# Altium PCB SwarmBots.PcbDoc
Units mm, origin at the board's own origin, x right, y up, seen from the top; angles counter-clockwise.
Board outline 23.94 x 24 mm, 4 copper layers (Component Side, Ground Plane, Power Plane, Solder Side), stack 1.1 mm thick; 73 components, 63 nets, 296 pads, 72 vias.
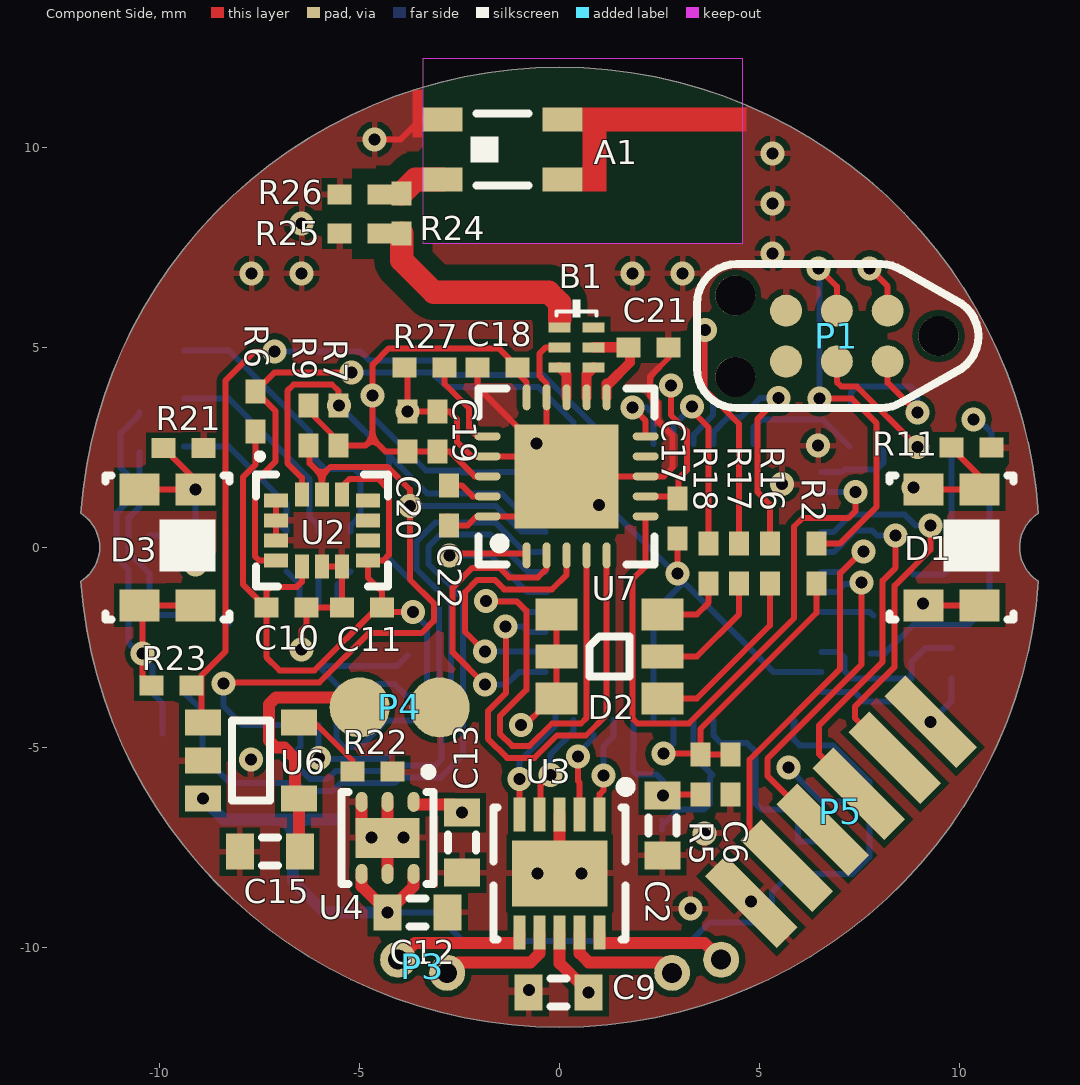
[diagram p0: Component Side view]
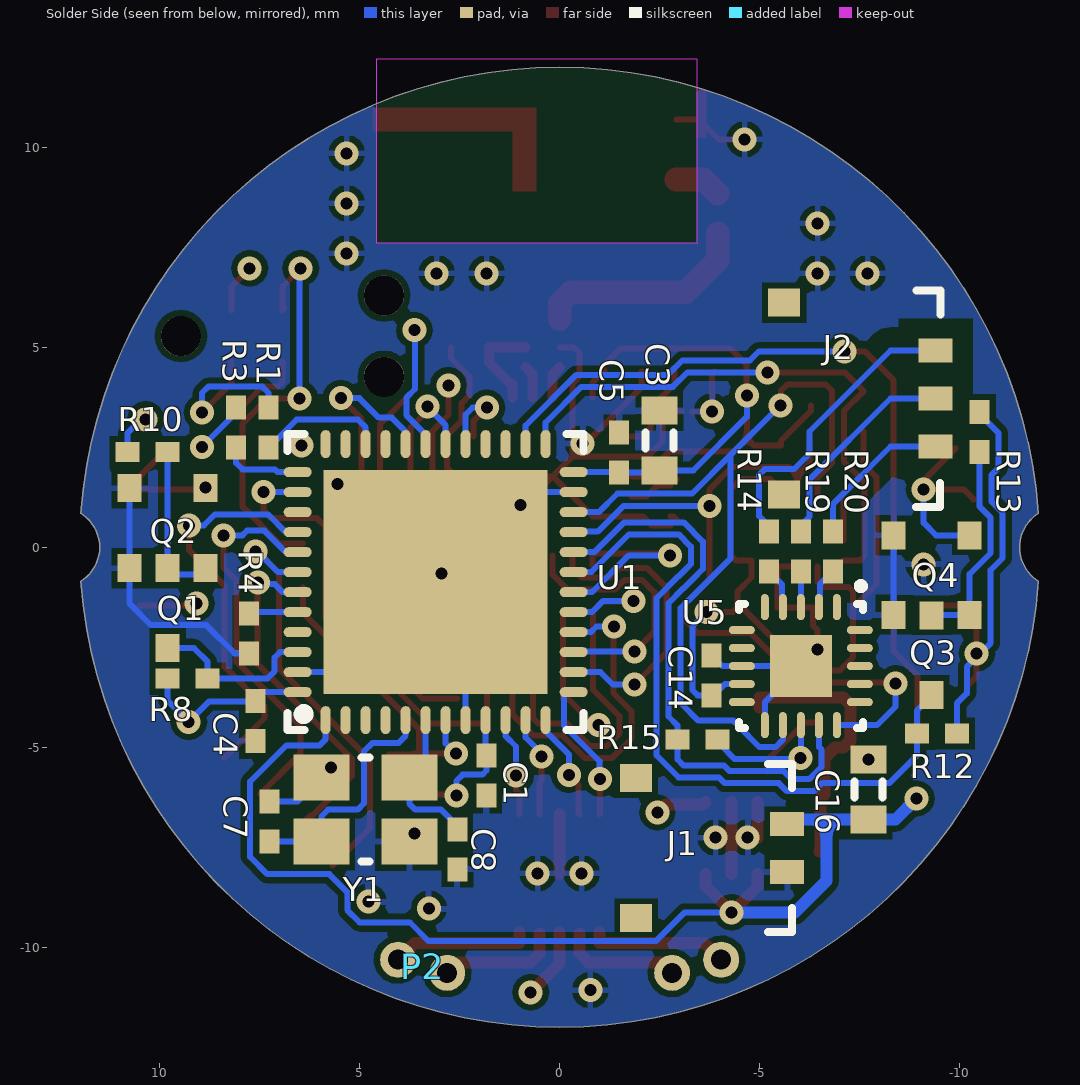
[diagram p1: Solder Side view, seen from below]
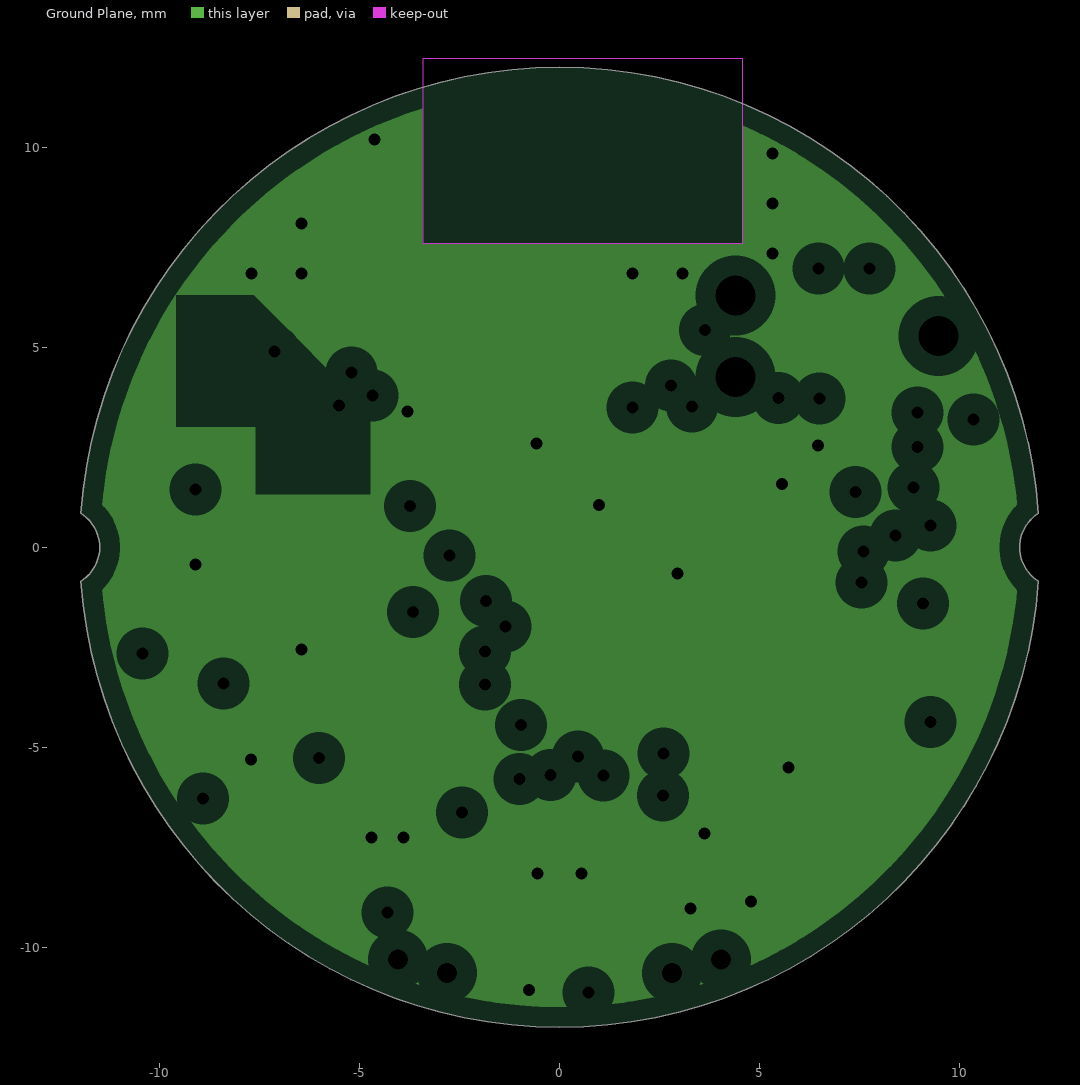
[diagram p2: Ground Plane, clearances drawn from the general rule]
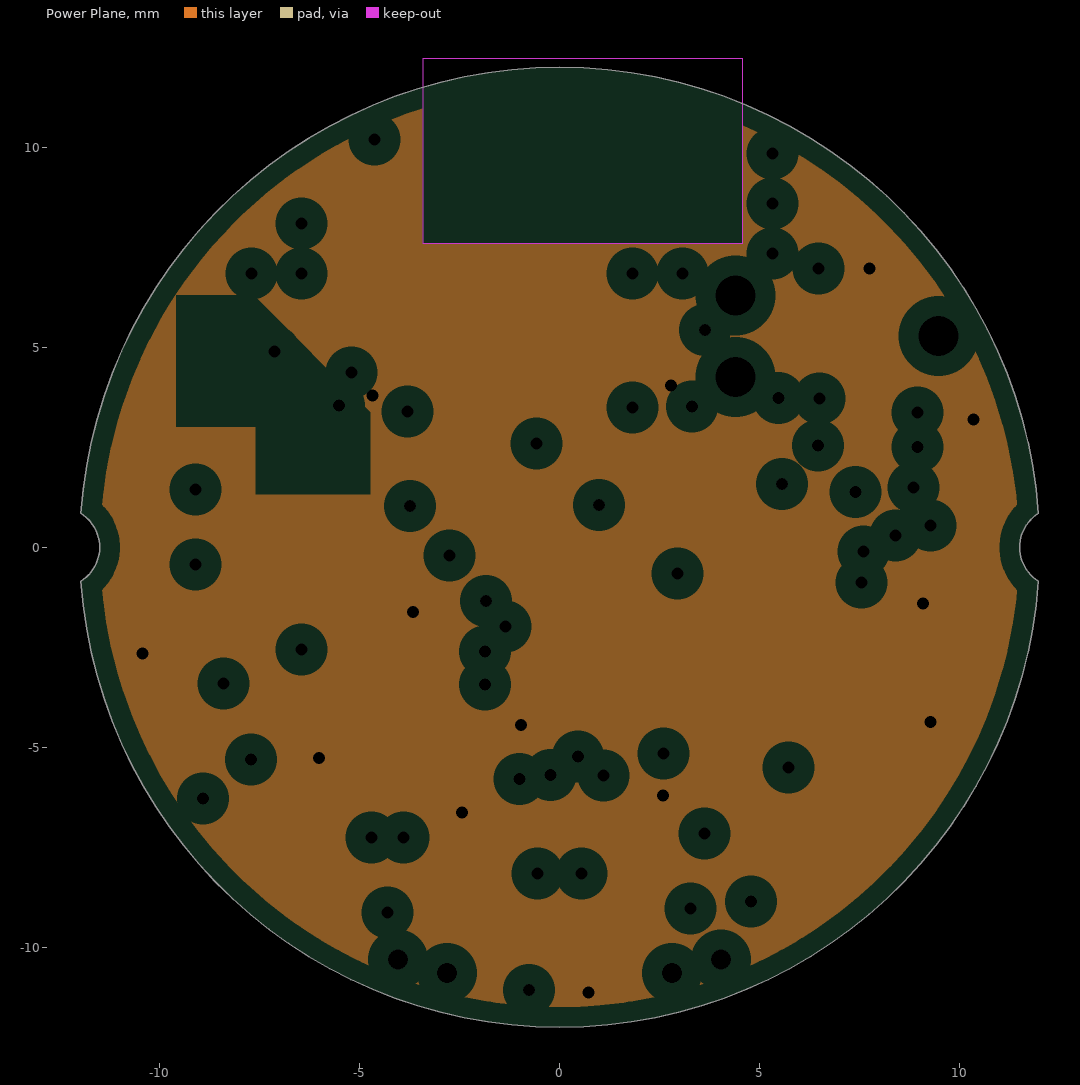
[diagram p3: Power Plane, clearances drawn from the general rule]

## Layer stack, top to bottom
Component Side: signal copper 0.035
Dielectric 1: prepreg 0.3, FR-4, Dk 4.2
Ground Plane: plane copper 0.035, net GND
Dielectric 3: prepreg 0.36, FR-4, Dk 4.2
Power Plane: plane copper 0.035, net +3.3V
Dielectric 4: prepreg 0.3, FR-4, Dk 4.2
Solder Side: signal copper 0.035

## Board outline
-11.97,-0.848 ccw(c0,0) 11.97,-0.848 cw(c12.5,0) 11.97,0.848 ccw(c0,0) -11.97,0.848 cw(c-12.5,0)

## Design rules (kind name [scope] priority, off if disabled: settings)
Clearance Clearance_Antenna [InNet('NetA1_1') Or InNet('NetB1_1') vs isRegion] p1: gap=0.4
Clearance Clearance_Electrodes [InNetClass('Electrodes') vs IsRegion] p2: gap=0.5
Clearance [All] p3: gap=0.15
ComponentClearance [All] p1: gap=0.15 collisioncheckmode=3 verticalgap=0.254 showdistances=FALSE
DiffPairsRouting [All] p1: maxlimit=10 minlimit=0.125 mostfreqgap=0.15 toplayer_minwidth=0.381 toplayer_maxwidth=0.381 toplayer_prefwidth=0.381 bottomlayer_minwidth=0.381 bottomlayer_maxwidth=0.381 bottomlayer_prefwidth=0.381 maxuncoupledlength=12.7
FabricationTestPointUsage FabricationTestPointUsage_1 [All] p1: valid=0 allowmultiple=FALSE
FabricationTestpoint FabricationTestpoint_1 [All] p1: side=3 testpointundercomponent=TRUE minsize=1.016 maxsize=2.54 preferedsize=1.524 minholesize=0 maxholesize=1.016 preferedholesize=0.813 testpointgrid=0.025 allowsidetop=TRUE allowsidebottom=TRUE usegrid=TRUE gridtolerance=0
HoleSize [All] p1: absolutevalues=TRUE maxlimit=6 minlimit=0.2 maxpercent=80.000 minpercent=20.000
HoleSize FabricationTestpoint [All] p2 off: absolutevalues=TRUE maxlimit=2.54 minlimit=0.025 maxpercent=80.000 minpercent=20.000
HoleSize FabricationTestPointUsage [All] p3 off: absolutevalues=TRUE maxlimit=2.54 minlimit=0.025 maxpercent=80.000 minpercent=20.000
MinimumSolderMaskSliver [All] p1: minsoldermaskwidth=0.01
PlaneClearance [All] p1: clearance=0.5
PlaneConnect [All] p1: planeconnectstyle=Relief reliefexpansion=0.4 reliefentries=4 reliefconductorwidth=0.15 reliefairgap=0.15
PolygonConnect [All] p1: connectstyle=Relief reliefconductorwidth=0.15 reliefentries=4 polygonreliefangle="90 Angle" airgapwidth=0.15
RoutingCorners [All] p1: cornerstyle=45-Degree minsetback=1.25 maxsetback=1.25
RoutingVias [All] p1: holewidth=0.3 width=0.6 viastyle="Through Hole" minholewidth=0.3 minwidth=0.6 maxholewidth=0.3 maxwidth=0.6
SilkToBoardRegionClearance [All] p1 off:
SilkToSilkClearance [All] p1: silktosilkclearance=0.1
SilkToSolderMaskClearance [IsPad] p1: minsilkscreentomaskgap=0.1 clearancetoexposedcopper=TRUE
SolderMaskExpansion [All] p1: expansion=0.075
UnpouredPolygon [All] p1: allowunpoured=FALSE
Width [All] p1: maxlimit=1 minlimit=0.15 preferedwidth=0.2 minimp=50.000000 maximp=50.000000 favimp=50.000000
17 further rules are at their usual default settings.

## Classes and differential pairs
component class SBMicrocontroller: C1 C2 C3 C4 C5 C6 C7 C8 P1 R1 R2 R3 R4 R5 U1 Y1
component class SBPeripherals: C9 C10 C11 C12 C13 C14 C15 C16 D1 D2 D3 J1 J2 P2 P3 P4 P5 Q1 Q2 Q3 Q4 R6 R7 R8 R9 R10 R11 R12 R13 R14 R15 R16 R17 R18 R19 R20 R21 R22 R23 U2 U3 U4 U5 U6
component class SBRadio: A1 B1 C17 C18 C19 C20 C21 C22 J3 R24 R25 R26 R27 U7
net class Electrodes: NetJ2_1 NetJ2_2 NetJ2_3 NetR14_1 NetR19_1 NetR20_1 NetU5_16
net class MOTOR_CONTROL[1..4]: MOTOR_CONTROL1 MOTOR_CONTROL2 MOTOR_CONTROL3 MOTOR_CONTROL4
net class RGBLED[1..3]: RGBLED1 RGBLED2 RGBLED3

## Components (designator, comment, footprint, x,y, rotation, side; value= is the part's Value field where it differs from the comment)
A1 "2450AT18D0100" 2450AT18D0100 -1.425,9.95 r0 top
B1 "2450BM14A0002T" 2450BM14A0002 0.425,5 r90 top
C1 "10nF" 0402 1.83,-5.71 r90 bottom
C2 "1uF" 0603 2.57,-6.95 r90 top
C3 "4.7uF" 0603 -2.49,2.67 r270 bottom
C4 "100nF" 0402 7.61,-4.34 r90 bottom
C5 "100nF" 0402 -1.485,2.375 r270 bottom
C6 "100nF" 0402 4.27,-5.68 r90 top
C7 "22pF" 0402 7.25,-6.86 r270 bottom
C8 "22pF" 0402 2.56,-7.55 r90 bottom
C9 "10uF" 0603 -0.025,-11.125 r0 top
C10 "100nF" 0402 -6.835,-1.51 r180 top
C11 "100nF" 0402 -4.94,-1.51 r0 top
C12 "1uF" 0603 -3.55,-9.125 r180 top
C13 "1uF" 0603 -2.44,-7.38 r90 top
C14 "100nF" 0402 -3.8,-3.2 r270 bottom
C15 "4.7uF" 0603 -7.245,-7.61 r0 top
C16 "4.7uF" 0603 -7.72,-6.05 r270 bottom
C17 "100nF" 0402 2.95,0.72 r90 top
C18 "100nF" 0402 -1.55,4.5 r0 top
C19 "10nF" 0402 -3.06,2.9 r270 top
C20 "1nF" 0402 -3.81,2.9 r270 top
C21 "2.2nF" 0402 2.22,5 r180 top
C22 "33nF" 0402 -2.77,1.05 r90 top
D1 "PD15-22C/TR8" PD15-22C/TR8 9.8,0 r270 top
D2 "SMLVN6RGB1W1" "3.5X2.8 MM 6-SMD" 1.24,-2.73 r0 top
D3 "PD15-22C/TR8" PD15-22C/TR8 -9.8,0 r270 top
J1 "78171-0002" 78171-0002 -3.8,-7.52 r270 bottom
J2 "78171-0003" 78171-0003 -7.51,3.72 r270 bottom
P1 "TC2030-IDC-NL" TC2030-IDC-NL 6.93,5.28 r180 top
P2 "HEADER 2X1 0.05\" UNPOLARIZED" "HEADER 2X1 0.05\" - UNPOLARIZED" 3.425,-10.475 r15 bottom
P3 "HEADER 2X1 0.05\" UNPOLARIZED" "HEADER 2X1 0.05\" - UNPOLARIZED" -3.425,-10.475 r165 top
P4 "CHARGING PAD" "CHARGING PAD" -4,-4 r0 top
P5 "EXTENSION_PORT" EXTENSION_PORT 9.275,-4.365 r225 top
Q1 "MMBT3904L" SOT23_L 9.8,-1.52 r270 bottom
Q2 "MMBT3904L" SOT23_L 9.8,0.48 r270 bottom
Q3 "MMBT3904L" SOT23_L -9.3,-2.69 r270 bottom
Q4 "MMBT3904L" SOT23_L -9.3,-0.7 r270 bottom
R1 "22R" 0402 7.28,2.99 r90 bottom
R2 "22R" 0402 6.42,-0.41 r90 top
R3 "22R" 0402 8.09,2.99 r90 bottom
R4 "100K" 0402 7.77,-2.15 r90 bottom
R5 "100K" 0402 3.52,-5.68 r270 top
R6 "100K" 0402 -7.6,3.4 r270 top
R7 "10K" 0402 -5.53,3.04 r270 top
R8 "100K" 0402 9.3,-3.28 r0 bottom
R9 "10K" 0402 -6.28,3.04 r90 top
R10 "560K" 0402 10.3,2.38 r0 bottom
R11 "1.5M" 0402 10.29,2.49 r180 top
R12 "100K" 0402 -9.43,-4.66 r180 bottom
R13 "560K" 0402 -10.5,2.88 r90 bottom
R14 "10K" 0402 -5.23,-0.1 r90 bottom
R15 "100K" 0402 -3.45,-4.81 r180 bottom
R16 "22.6R" 0402 5.26,-0.41 r270 top
R17 "130R" 0402 4.489,-0.41 r270 top
R18 "24.9R" 0402 3.725,-0.41 r270 top
R19 "10K" 0402 -6.03,-0.1 r90 bottom
R20 "10K" 0402 -6.83,-0.1 r90 bottom
R21 "1.5M" 0402 -9.4,2.48 r180 top
R22 "10K" 0402 -4.68,-5.61 r0 top
R23 "100K" 0402 -9.7,-3.45 r180 top
R24 "0R" 0402 -3.95,8.35 r90 top
R25 "0R" 0402 -5,7.85 r0 top
R26 "0R" 0402 -5,8.825 r0 top
R27 "22K 0402 1/16W ±1%" 0402 -3.375,4.5 r0 top
U1 "STM32F051C8U6" QFN50P700X700X60_HS-49L 3.1,-0.87 r90 bottom locked
U2 "LSM6DS3" "LGA-14 2.5X3X0.86 MM 14L" -5.945,0.425 r0 top
U3 "A3901SEJTR-T" DFN50P300X300X75_HS-11N 0,-8.15 r180 top
U4 "ADP122ACPZ-3.3-R7" "LFCSP-6 2.0X2.0X0.55" -4.3,-7.265 r180 top
U5 "AT42QT1070-MMH" QFN45P300X300X85_HS-21L -6.03,-2.97 r270 bottom
U6 "MCP73831T-2ACI/OT" SOT-23-OT5_L -7.72,-5.33 r0 top
U7 "nRF24L01+" QFN50P400X400X95_HS-21L 0.175,1.775 r90 top
Y1 "7V-16.000MAAE-T" "3.2X2.5 CRYSTAL" 4.86,-6.56 r180 bottom

## Footprints (in the part's own frame and the unit in brackets; to place one, negate y for a bottom-side part, rotate by r counter-clockwise, add the part's x,y. Pads: shape width x height; smd on the part's side, far side on the other; paste and mask are expansions set on the pad)
"3.2X2.5 CRYSTAL" [mm]
  rect 1.4x1.15 smd: 1(-1.1,-0.8) 2(1.1,-0.8) 3(1.1,0.8) 4(-1.1,0.8)
  silkscreen extent -0.1,-1.3 0.1,1.3, body extent -1.6,-1.25 1.6,1.25, height 0.8
"3.5X2.8 MM 6-SMD" [mm] "3.5 x 2.8 mm 6-SMD Flat Leads"
  rect 1.05x0.8 smd: 1(-1.325,1.05) 3(-1.325,-1.05) 4(1.325,-1.05) 6(1.325,1.05)
  rect 1.05x0.6 smd: 2(-1.325,0) 5(1.325,0)
  silkscreen extent -0.5,-0.5 0.5,0.5, body extent -1.75,-1.4 1.75,1.4, height 0.6
0402 [mm] "Chip Body 1.0 x 0.5 mm (LxW typ)"
  rect 0.6x0.5 smd: 1(-0.5,0) 2(0.5,0)
  body extent -0.55,-0.3 0.55,0.3, height 0.55
0603 [mm] "Chip Body 1.6 x 0.8 mm (LxW typ)"
  rect 0.7x0.9 smd: 1(-0.75,0) 2(0.75,0)
  silkscreen extent -0.2,-0.35 0.2,0.35, body extent -0.85,-0.48 0.85,0.48, height 0.9
2450AT18D0100 [mm] "ANTENNA CHIP 2.4GHZ"
  rect 1x0.6 smd: 1(-1.5,-0.75) 2(-1.5,0.75) 2(1.5,-0.75) 2(1.5,0.75)
  silkscreen extent -0.8,-0.9 0.65,0.9, body extent -1.6,-0.8 1.6,0.8, height 1.3
2450BM14A0002 [mm] "2.45 GHz Impedance Matched Balun-Filter: Optimized for Nordic's Chipset nRF24L01"
  rect 0.25x0.55 smd: 1(0.5,0.425) 2(0,0.425) 3(-0.5,0.425) 4(-0.5,-0.425) 5(0,-0.425) 6(0.5,-0.425)
  silkscreen extent 0.75,-0.5 1.2,0.5, body extent -0.8,-0.4 0.8,0.4, height 0.6
78171-0002 [mm]
  rect 0.6x0.85 smd: 1(-0.6,1.888) 2(0.6,1.888)
  rect 0.7x0.8 smd: 3(-1.75,-1.887) 4(1.75,-1.887)
  silkscreen extent -2.1,1.41 2.1,2.01, body extent -2.1,-2.51 2.1,2.02, height 1.45
78171-0003 [mm]
  rect 0.6x0.85 smd: 1(-1.2,1.888) 2(0,1.888) 3(1.2,1.888)
  rect 0.7x0.8 smd: 4(-2.4,-1.9) 5(2.4,-1.9)
  silkscreen extent -2.7,1.4 2.71,2.01, body extent -2.7,-2.5 2.7,2.03, height 1.46
"CHARGING PAD" [mm]
  round 1.5 smd paste-5: 1(-1,0) 2(1,0)
  body extent -1.74,-0.75 1.75,0.75, height 0
DFN50P300X300X75_HS-11N [mm]
  rect 0.3x0.85 smd: 1(-1,-1.475) 2(-0.5,-1.475) 3(0,-1.475) 4(0.5,-1.475) 5(1,-1.475) 6(1,1.475) 7(0.5,1.475) 8(0,1.475) 9(-0.5,1.475) 10(-1,1.475)
  rect 2.38x1.65 smd: 11(0,0)
  silkscreen extent -1.78,-2.28 1.65,1.65, body extent -1.5,-1.5 1.5,1.5, height 0.75
EXTENSION_PORT [mil]
  rect 29x100 smd paste-78.74: 1(0,0) 2(50,0) 3(100,0) 4(150,0) 5(200,0) 6(250,0)
  body extent -15,-45 265,45, height 0
"HEADER 2X1 0.05\" - UNPOLARIZED" [mm]
  round 0.9 hole 0.5: 1(0.635,0) 2(-0.635,0)
  body extent -1.25,-0.6 1.25,0.6, height 0.01
"LFCSP-6 2.0X2.0X0.55" [mm] ". 6-Lead Lead Frame Chip Scale Package [LFCSP_UD]  2.00 mm× 2.00 mm Body, Ultra Thin, Dual Lead  (CP-6-3)"
  oval 0.3x0.5 smd: 1(-0.65,-0.9) 2(0,-0.9) 3(0.65,-0.9) 4(0.65,0.9) 5(0,0.9) 6(-0.65,0.9)
  rect 1.6x1 smd: 7(0,0)
  silkscreen extent -1.15,-1.75 1.15,1.15, body extent -1,-1 1,1, height 0.6
"LGA-14 2.5X3X0.86 MM 14L" [mm] "LGA, 14-Leads, Body 3.00x2.50mm, Pitch 0.50mm, IPC High Density"
  rect 0.6x0.35 smd: 1(-1.15,0.75) 2(-1.15,0.25) 3(-1.15,-0.25) 4(-1.15,-0.75) 8(1.15,-0.75) 9(1.15,-0.25) 10(1.15,0.25) 11(1.15,0.75)
  rect 0.35x0.6 smd: 5(-0.5,-0.9) 6(0,-0.9) 7(0.5,-0.9) 12(0.5,0.9) 13(0,0.9) 14(-0.5,0.9)
  silkscreen extent -1.65,-1.4 1.65,1.9, body extent -1.5,-1.25 1.5,1.25, height 0.86
PD15-22C/TR8 [mm] "Silicon PIN Photodiode"
  rect 0.8x1 smd: 1(-1.45,0.7) 1(-1.45,-0.7) 2(1.45,0.7) 2(1.45,-0.7)
  silkscreen extent -1.8,-1.55 1.8,1.55, body extent -1.65,-1.4 1.65,1.4, height 1.1
QFN45P300X300X85_HS-21L [mm] "QFN, 20-Leads, Body 3.00x3.00mm, Pitch 0.45mm, Thermal Pad 1.55x1.55mm, IPC High Density"
  oval 0.65x0.2 smd: 1(-1.475,0.9) 2(-1.475,0.45) 3(-1.475,0) 4(-1.475,-0.45) 5(-1.475,-0.9) 11(1.475,-0.9) 12(1.475,-0.45) 13(1.475,0) 14(1.475,0.45) 15(1.475,0.9)
  oval 0.2x0.65 smd: 6(-0.9,-1.475) 7(-0.45,-1.475) 8(0,-1.475) 9(0.45,-1.475) 10(0.9,-1.475) 16(0.9,1.475) 17(0.45,1.475) 18(0,1.475) 19(-0.45,1.475) 20(-0.9,1.475)
  rect 1.55x1.55 smd: 21(0,0)
  silkscreen extent -2.07,-1.55 1.55,1.57, body extent -1.55,-1.55 1.55,1.55, height 0.85
QFN50P400X400X95_HS-21L [mm] "QFN, 20-Leads, Body 4,00x4,00mm, Pitch 0,50mm, Thermal Pad 2,60x2,60mm, IPC High Density"
  oval 0.65x0.2 smd: 1(-1.975,1) 2(-1.975,0.5) 3(-1.975,0) 4(-1.975,-0.5) 5(-1.975,-1) 11(1.975,-1) 12(1.975,-0.5) 13(1.975,0) 14(1.975,0.5) 15(1.975,1)
  oval 0.2x0.65 smd: 6(-1,-1.975) 7(-0.5,-1.975) 8(0,-1.975) 9(0.5,-1.975) 10(1,-1.975) 16(1,1.975) 17(0.5,1.975) 18(0,1.975) 19(-0.5,1.975) 20(-1,1.975)
  rect 2.6x2.6 smd: 21(0,0)
  silkscreen extent -2.2,-2.2 2.2,2.2, body extent -2.05,-2.05 2.05,2.05, height 0.95
QFN50P700X700X60_HS-49L [mm] "QFN, 48-Leads, Body 7,00x7,00mm, Pitch 0,50mm, Thermal Pad 5,60x5,60mm, IPC High Density"
  oval 0.7x0.25 smd: 1(-3.45,2.75) 2(-3.45,2.25) 3(-3.45,1.75) 4(-3.45,1.25) 5(-3.45,0.75) 6(-3.45,0.25) 7(-3.45,-0.25) 8(-3.45,-0.75) 9(-3.45,-1.25) 10(-3.45,-1.75) 11(-3.45,-2.25) 12(-3.45,-2.75) 25(3.45,-2.75) 26(3.45,-2.25) 27(3.45,-1.75) 28(3.45,-1.25) 29(3.45,-0.75) 30(3.45,-0.25) 31(3.45,0.25) 32(3.45,0.75) 33(3.45,1.25) 34(3.45,1.75) 35(3.45,2.25) 36(3.45,2.75)
  oval 0.25x0.7 smd: 13(-2.75,-3.45) 14(-2.25,-3.45) 15(-1.75,-3.45) 16(-1.25,-3.45) 17(-0.75,-3.45) 18(-0.25,-3.45) 19(0.25,-3.45) 20(0.75,-3.45) 21(1.25,-3.45) 22(1.75,-3.45) 23(2.25,-3.45) 24(2.75,-3.45) 37(2.75,3.45) 38(2.25,3.45) 39(1.75,3.45) 40(1.25,3.45) 41(0.75,3.45) 42(0.25,3.45) 43(-0.25,3.45) 44(-0.75,3.45) 45(-1.25,3.45) 46(-1.75,3.45) 47(-2.25,3.45) 48(-2.75,3.45)
  rect 5.6x5.6 smd: 49(0,0)
  silkscreen extent -3.7,-3.7 3.7,3.7, body extent -3.55,-3.55 3.55,3.55, height 0.6
SOT23_L [mm] "SOT23, 3-Leads, Body 2.9x1.3mm, Pitch 0.95mm, Lead Span 2.3mm - Reverse Pinning, IPC High Density"
  rect 0.7x0.6 smd: 1(-1,0.95) 2(-1,-0.95) 3(1,0)
  body extent -1.13,-1.5 1.13,1.5, height 1.21
SOT-23-OT5_L [mm] "SOT23, 5-Leads, Body 2.9x1.6mm, Pitch 0.95mm, Lead Span 2.7mm, IPC High Density"
  rect 0.9x0.65 smd: 1(-1.2,0.95) 2(-1.2,0) 3(-1.2,-0.95) 4(1.2,-0.95) 5(1.2,0.95)
  silkscreen extent -0.48,-1 0.48,1, body extent -0.9,-1.55 0.9,1.55, height 1.45
TC2030-IDC-NL [mm] "TagConnector TC2030-IDC-NL"
  round 0.8 smd paste-1: 1(-1.27,-0.635) 2(-1.27,0.635) 3(0,-0.635) 4(0,0.635) 5(1.27,-0.635) 6(1.27,0.635)
  round 1 hole 1 unplated mask+0: ""(-2.54,0) ""(2.54,-1.016) ""(2.54,1.016)
  Component Side pour cut-out: -1.27,-0.085 -1.27,0.085 -1.06,0.127 -0.881,0.246 -0.762,0.425 -0.72,0.635 -0.72,0.635 -0.55,0.635 -0.496,0.396 -0.343,0.205 -0.122,0.099 0.122,0.099 0.343,0.205 0.496,0.396 0.55,0.635 0.55,0.635 0.72,0.635 0.762,0.425 0.881,0.246 1.06,0.127 1.27,0.085 1.27,0.085 1.27,-0.085 1.06,-0.127 0.881,-0.246 0.762,-0.425 0.72,-0.635 0.72,-0.635 0.55,-0.635 0.496,-0.396 0.343,-0.205 0.122,-0.099 -0.122,-0.099 -0.343,-0.205 -0.496,-0.396 -0.55,-0.635 -0.55,-0.635 -0.72,-0.635 -0.762,-0.425 -0.881,-0.246 -1.06,-0.127 -1.27,-0.085
  silkscreen extent -3.54,-1.8 3.5,1.8, body extent -1.67,-1.03 1.67,1.03, height 0

## Part data
A1: "JOHANSON TECHNOLOGY 2450AT18D0100  ANTENNA, CERAMIC, 2.45GHZ"
B1: "Johanson Technology Impedance Matched Balun Filter Integrated Passive for nRF24L01"
C1 C19: "10nF 0402 X7R 25V ±5%"
C2 C12 C13: "1uF 0603 X5R 10V ±10%"
C3 C15 C16: "4.7uF 0603 X5R 10V ±10%"
C4 C5 C6 C10 C11 C14 C17 C18: "100nF 0402 X7R 16V ±10%"
C7 C8: "22pF 0402 NP0/CG0 50V ±5%"
C9: "10uF 0603 X5R 6.3V ±20%"
C20: "1nF 0402 X7R 50V ±10%"
C21: "2.2nF 0402 X7R 50V ±10%"
C22: "33nF 0402 X7R 50V ±10%"
D1 D3: "Everlight PD15-22C/TR8 Silicon PIN Photodiode"
D2: "ROHM SMLVN6RGB1W1 LED Tri-Color Blue/Green/Red Chip LED 6-Pin 1411 T/RLED Tri-Color Blue/Green/Red Chip LED 6-Pin 1411"
J1: "Molex Pico-EZmate™ Wire-to-Board Header, 2 contacts"
J2: "Molex Pico-EZmate™ Wire-to-Board Header, 3 contacts"
P1: "TagConnect TC2030-IDC-NL SWD Programming Connector"
Q1 Q2 Q3 Q4: "On Semiconductor MMBT3904L General Purpose Transistor  NPN Silicon"
R1 R2 R3: "22R 0402 1/16W ±1%"
R4 R5 R6 R8 R12 R15 R23: "100K 0402 1/16W ±1%"
R7 R9 R14 R19 R20 R22: "10K 0402 1/16W ±1%"
R10 R13: "560K 0402 1/16W ±1%"
R11 R21: "1.5M 0402 1/16W ±1%"
R16: "22.6R 0402 1/16W ±0.05R"
R17: "130R 0402 1/16W ±0.05R"
R18: "24.9R 0402 1/16W ±0.05R"
R24 R25 R26: "0R 0402 1/16W ±0.05R"
R27: library part 22K
U1: "STMICROELECTRONICS  STM32F051C8U6  MCU 32BIT CORTEX-M0 48MHZ UFQFPN-48"
U2: "STMicroelectronics iNEMO inertial module:   3D accelerometer and 3D gyroscope"
U3: "ALLEGRO MICROSYSTEMS - A3901SEJTR-T - IC, MOTOR DRIVER"
U4: "Analog Devices ADP122ACPZ-3.3-R7 - 5.5 V Input, 300 mA, Low Quiescent  Current, CMOS Linear Regulator"
U5: "Atmel Seven-channel QTouch® Touch Sensor IC"
U6: "Miniature Single-Cell, Fully Integrated Li-Ion, Li-Polymer Charge Management Controller, 4.2V, 5-Pin SOT-23, Industrial Temperature, Tape and Reel"
U7: "Nordic Semi Ultra low power 2.4GHz RF Transceiver IC"
Y1: "TXC - 7V-16.000MAAE-T, 16MHZ, 30PPM, 12PF - CRYSTAL"

## Via types
v1: diameter 0.6, hole 0.3, Component Side to Solder Side, 72 vias

## Nets (pads, with @x,y where several pads share a name; then routed paths per layer and width w, separated by ;. In a path a pad name is that pad's centre, name@x,y a point inside that pad or via, vN(x,y) a via of type N, cw(c..) or ccw(c..) an arc to the next point about the centre after c; other vN are vias at no path point)
+3.3V: C1.2 C2.2 C3.2 C4.2 C5.2 C9.2 C10.2 C11.2 C13.2 C14.2 C17.2 C18.2 C19.2 C20.2 D1.2 D2.1 D2.2 D2.3 D3.2 P1.1 P5.1 R5.2 R6.2 R7.2 R8.2 R9.2 R10.2 R12.2 R13.2 R15.2 R23.2 U1.9 U1.24 U1.48 U2.5 U2.8 U2.12 U3.8 U4.1 U5.9 U5.13 U7.7 U7.15 U7.18 | length 76.4
  Component Side w0.15: R23.2 -10.425,-3.225 v1(-10.425,-2.65) -10.425,-1.525 -10.5,-1.45 D3.2@-9.1,-1.45 ; R6.2 -7.6,2.074 -7.92,1.754 -7.92,-0.925 C10.2 ; U2.5 -6.445,-0.865 -6.57,-0.99 -7.22,-0.99 -7.335,-1.105 C10.2 ; R9.2 -6.28,3.408 -5.53,2.658 R7.2 -4.86,2.54 -4.68,2.72 ; U2.12 -5.445,1.515 -5.25,1.71 -4.537,1.71 -4.27,1.443 -4.27,-0.19 -4.405,-0.325 U2.8 -4.795,-0.755 -4.44,-1.11 C11.2 ; v1(-3.67,-1.62) -4.33,-1.62 C11.2 ; U7.18 -2.127,1.775 -2.752,2.4 C19.2 C20.2 -4.36,2.4 -4.68,2.72 ; C18.2@-1.125,4.425 -0.825,4.125 U7.15 ; C18.2 -1.525,4.975 -2.443,4.975 -3.482,4.975 -4.268,4.975 -4.675,4.568 -4.675,3.795 v1(-4.68,3.79) -4.68,2.72 ; v1(-0.97,-4.44) -1.02,-4.44 -1.14,-4.56 -1.06,-4.64 -0.2,-3.78 D2.3 D2.2 D2.1 ; U7.7 2.95,1.275 2.977,1.302 2.977,1.723 3.183,1.928 3.183,2.905 2.78,3.308 v1(2.78,4.051) ; C2.2@2.59,-6.18 R5.2@3.68,-6.18 ; v1(7.75,6.975) 8.2,6.525 P1.1@8.2,5.925 ; D1.2@9.1,-1.45 D1.2@10.5,-1.45 ; C10.2 -7.335,-2.745 -7,-3.08 -6.134,-3.08 -4.564,-1.51 C11.2
  Component Side w0.3: U4.1 -3.585,-6.43 -2.64,-6.43 v1(-2.44,-6.63) ; U3.8 0,-10.4 v1(0.725,-11.125)
  Solder Side w0.15: R13.2 -10.5,3.33 -10.975,2.855 -10.975,1.987 -10.8,1.812 -10.8,1.142 -11.075,0.867 -11.075,-0.267 -10.775,-0.567 -10.775,-2.395 -10.18,-2.99 -10.18,-3.65 -9.93,-3.9 R12.2 ; U5.13 -6.03,-5.26 v1(-6.02,-5.27) -5.995,-5.295 -4.374,-5.295 -4.01,-4.931 R15.2@-4.01,-4.81 ; v1(-4.68,3.79) -4.68,3.26 -3.34,1.92 C3.2 -2.445,1.875 C5.2 ; U5.9 -4.13,-3.42 -3.85,-3.7 C14.2 -3.45,-3.7 -3.32,-3.57 -3.32,-1.97 v1(-3.67,-1.62) ; C5.2@-1.6,1.88 U1.24 ; C1.2 1.83,-5.58 1.935,-5.685 2.425,-5.685 2.58,-5.84 v1(2.58,-6.2) ; C1.2@1.85,-5.155 U1.9 ; U1.48 7.38,-3.62 7.61,-3.85 8.76,-3.85 v1(9.275,-4.365) 9.8,-3.84 R8.2 ; v1(10.35,3.2) 10.46,3.2 10.8,2.86 R10.2
  other v1: 9.08,-1.4
ANT1: B1.4 U7.12 | length 0.8
  Component Side w0.254: U7.12 0.675,4.325 B1.4
ANT2: B1.3 U7.13 | length 0.8
  Component Side w0.254: B1.3 0.175,4.325 U7.13
CHARGING: R23.1 U1.26 U6.1 | length 19.5
  Component Side w0.15: U6.1 -8.95,-4.35 -8.95,-3.2 -8.35,-2.6 -8.35,4.175 -7.625,4.9 v1(-7.125,4.9)
  Solder Side w0.15: v1(-7.125,4.9) -4.983,4.9 -4.758,4.675 -3.071,4.675 -2.706,4.31 -0.416,4.31 0.85,3.044 U1.26
GND: A1.2 B1.2 C1.1 C2.1 C3.1 C4.1 C5.1 C6.1 C7.1 C8.1 C9.1 C10.1 C11.1 C12.1 C13.1 C14.1 C15.1 C16.1 C17.1 C18.1 C19.1 C20.1 C21.1 C22.1 J1.2 P1.5 P4.2 P5.6 Q1.2 Q2.2 Q3.2 Q4.2 R4.1 R11.1 R21.1 R22.2 R25.1 R26.1 R27.1 U1.8 U1.23 U1.47 U1.49 U2.1 U2.2 U2.3 U2.6 U2.7 U3.3 U3.11 U4.2 U4.3 U4.5 U4.7 U5.8 U5.11 U5.21 U6.2 U7.8 U7.14 U7.17 U7.20 U7.21 Y1.2 Y1.4 | length 61.2
  Component Side w0.15: U2.3 U2.2 U2.1 ; v1(-6.45,-2.55) -6.45,-2.075 -6.335,-1.96 C10.1 C11.1 -5.44,-0.48 U2.7 U2.6 ; v1(-4.625,10.2) -3.975,10.2 -3.475,10.7 A1.2@-2.925,10.7 ; R27.1@-3.875,4.4 -3.81,4.335 v1(-3.81,3.4) -3.312,3.4 ; C19.1 -2.76,3.4 -2.565,3.205 -2.565,2.637 -2.203,2.275 U7.17 U7.21@-0.325,2.275 ; C22.1@-2.92,0.7 -2.845,0.775 C22.1@-2.77,0.775 ; C22.1 -2.3,0.55 -2.075,0.775 U7.20 -0.825,0.775 U7.21 ; C18.1@-2.05,4.4 -2.05,4 U7.21@-0.325,2.275 ; B1.2 -0.35,5 -0.5,4.85 -0.5,4.282 -0.45,4.232 -0.45,4.22 -0.325,4.095 U7.14 U7.21@-0.325,2.275 ; U7.21@0.935,1.015 U7.21 ; C21.1 2.72,4.733 2.255,4.268 2.255,3.833 2.255,3.797 2.45,3.602 2.45,3.16 2.82,2.79 2.82,1.99 2.605,1.775 U7.8 U7.21 ; v1(2.95,-0.66) C17.1 ; U7.21@-0.325,2.275 U7.21
  Component Side w0.3: U4.3 -4.95,-7.265 U4.7 ; U4.5 U4.7 ; U4.2 U4.7 ; U3.11 U3.3
  Solder Side w0.15: Q3.2 -8.39,-1.73 -8.25,-1.87 Q3.2@-8.3,-1.92 ; Q3.2@-8.35,-1.37 Q4.2 ; U5.11 -5.13,-3.87 U5.21 U5.8 -4.07,-2.97 C14.1 ; U1.23 0.85,1.38 U1.49@2.92,-0.69 ; U1.8 2.35,-1.62 U1.49 5.35,-3.12 U1.47 ; Y1.4 6.56,-6.36 C7.1 ; R4.1 8.13,-2.65 8.835,-1.945 10.215,-1.945 10.75,-1.41 Q1.2 Q2.2 Q2.2@10.75,1.5 ; Q2.2@10.75,1.52 10.76,1.51 Q2.2@10.76,1.5
  other v1: -0.77,-11.07 3.27,-9.03 4.785,-8.855 -0.55,-8.15 0.55,-8.15 -4.7,-7.26 -3.9,-7.26 3.625,-7.15 5.72,-5.5 -7.72,-5.3 -9.1,-0.425 0.98,1.06 5.56,1.58 6.46,2.54 -0.575,2.6 -7.7,6.85 -6.45,6.85 1.825,6.85 3.075,6.85 5.325,7.35 -6.45,8.1 5.325,8.6 5.325,9.85
I2C.SCL: R9.1 U1.21 U2.13 U5.15 | length 19.3
  Component Side w0.15: v1(-8.4,-3.4) -8.4,-3.38 -6.01,-3.38 -4.775,-2.145 -3.453,-2.145 -3.145,-1.837 -3.145,-1.403 -3.74,-0.808 v1(-3.74,1.03) -3.74,1.44 -4.31,2.01 -5.73,2.01 -5.945,1.795 ; R9.1@-6.25,2.65 -6.25,2.1 -5.945,1.795 ; U2.13 -5.945,1.795
  Solder Side w0.15: v1(-8.4,-3.4) -8.4,-3.98 -7.935,-4.445 U5.15 ; v1(-3.74,1.03) -1.591,1.03 -0.952,0.39 -0.35,0.39 U1.21
I2C.SDA: R7.1 U1.22 U2.14 U5.12 | length 21
  Component Side w0.15: U2.14 -6.445,1.74 -6.81,2.105 -6.81,3.91 -6.65,4.07 -5.69,4.07 -5.53,3.91 R7.1
  Solder Side w0.15: U5.12 -5.58,-4.81 -5.395,-4.995 -4.995,-4.995 -4.475,-4.475 -4.475,-4.467 -4.343,-4.335 -3.465,-4.335 -3.02,-3.89 -3.02,-1.521 -3.216,-1.325 -3.223,-1.325 -3.453,-1.095 -4.265,-0.283 -4.265,2.285 -4.253,2.285 ; v1(-5.52,3.54) -5.508,3.54 -4.253,2.285 ; U1.22 -0.98,0.88 -1.445,1.345 -3.313,1.345 -4.253,2.285
I2C_EXT.SCL: P5.5 U1.42 | length 10.7
  Component Side w0.15: P5.5 4.745,-7.019 4.745,-5.308 7.014,-3.04 7.014,-0.646 7.55,-0.11 v1(7.6,-0.11)
  Solder Side w0.15: U1.42 7.04,-0.62 7.55,-0.11 v1(7.6,-0.11)
I2C_EXT.SDA: P5.4 U1.43 | length 8.9
  Component Side w0.15: P5.4 6.231,-6.709 6.187,-6.709 5.19,-5.712 5.19,-5.288 7.55,-2.928 7.55,-0.878 v1(7.547,-0.875)
  Solder Side w0.15: U1.43 6.92,-1.12 7.12,-0.92 7.502,-0.92 v1(7.547,-0.875)
IMU_INT: R6.1 U1.25 U2.4 | length 14.3
  Component Side w0.15: U2.4 -7.515,-0.325 -7.62,-0.22 -7.62,1.63 -7.11,2.14 -7.11,3.41 R6.1 -7.125,4.375 -6.809,4.375 ; -6.809,4.375 v1(-5.2,4.375)
  Solder Side w0.15: v1(-5.2,4.375) -3.195,4.375 -2.83,4.01 -0.54,4.01 0.35,3.12 U1.25
IO1: P5.2 U1.40 | length 10
  Component Side w0.15: P5.2 7.38,-4.266 7.38,-3.985 8.375,-2.99 8.375,-0.957 9.27,-0.062 v1(9.27,0.55)
  Solder Side w0.15: U1.40 6.846,0.38 7.291,0.825 8.617,0.825 8.892,0.55 v1(9.27,0.55)
IO2: P5.3 U1.41 | length 10.9
  Component Side w0.15: P5.3@6.725,-5.407 P5.3 6.482,-5.164 6.482,-4.459 8.075,-2.866 8.075,-0.833 8.4,-0.508 v1(8.4,0.3)
  Solder Side w0.15: U1.41 6.848,-0.12 7.383,0.415 7.817,0.415 7.932,0.3 v1(8.4,0.3)
MCU_X1_16MHZ: C7.2 U1.5 Y1.1 | length 6
  Solder Side w0.15: U1.5 3.85,-4.71 4.035,-4.895 4.685,-4.895 4.89,-5.1 4.89,-6.4 5.05,-6.56 5.79,-6.56 5.96,-6.73 Y1.1 C7.2
MCU_X2_16MHZ: C8.2 U1.6 Y1.3 | length 3.7
  Solder Side w0.15: C8.2@2.555,-6.83 C8.2@2.56,-6.83 ; C8.2 2.56,-6.962 2.962,-6.56 3.61,-6.56 3.76,-6.41 Y1.3 ; U1.6 3.35,-5.22 Y1.3@3.825,-5.695
MOTOR_CONTROL1: U1.10 U3.1 | length 2.5
  Component Side w0.15: U3.1 1,-6.17 1.09,-6.08 v1(1.09,-5.7)
  Solder Side w0.15: v1(1.09,-5.7) 1.09,-4.98 1.35,-4.72 U1.10
MOTOR_CONTROL2: U1.11 U3.2 | length 2.2
  Component Side w0.15: v1(0.46,-5.23) 0.46,-5.84 0.5,-5.88 U3.2
  Solder Side w0.15: v1@0.31,-5.22 v1@0.32,-5.23 ; v1(0.46,-5.23) 0.46,-5.197 0.515,-5.142 0.489,-5.116 0.85,-4.756 0.85,-4.68
MOTOR_CONTROL3: U1.12 U3.4 | length 2.7
  Component Side w0.15: U3.4 -0.475,-6.65 -0.475,-5.935 v1(-0.23,-5.69)
  Solder Side w0.15: v1(-0.23,-5.69) -0.23,-5.178 0.35,-4.598 U1.12
MOTOR_CONTROL4: U1.13 U3.5 | length 3.7
  Component Side w0.15: v1(-1.01,-5.79) -1.01,-6.665 U3.5
  Solder Side w0.15: v1(-1.01,-5.79) -1,-5.78 -1,-5.37 -1.01,-5.36 -0.11,-4.46 -0.11,-3.62 U1.13
NetA1_1: A1.1 R24.2 R26.2 | length 1.2
  Component Side w0.6: R24.2 -3.6,9.2 A1.1
NetB1_1: B1.1 R24.1 R25.2 | length 5.5
  Component Side w0.582: R24.1 -3.95,7.175 -3.15,6.375 -0.275,6.375 0,6.1 0,5.7
NetC15_2: C15.2 P4.1 U6.4 | length 6.7
  Component Side w0.3: C15.2 -6.52,-7.585 U6.4 -6.62,-6.18 -6.62,-5.27 -6.885,-5.005 -7.094,-5.005 -7.27,-4.829 -7.27,-3.931 -7.094,-3.755 -5,-3.755 P4.1
NetC22_2: C22.2 U7.19 | length 1.4
  Component Side w0.15: C22.2@-2.92,1.7 -2.63,1.7 C22.2@-2.625,1.695 ; C22.2 -2.45,1.55 -2.175,1.275 U7.19
NetD1_1: D1.1 Q2.1 R11.2 | length 2.7
  Component Side w0.15: D1.1@9.1,1.45 10.5,1.45 10.5,1.78 R11.2
  other v1: 8.85,1.49
NetD2_4: D2.4 R16.2 | length 4.4
  Component Side w0.15: D2.4 3.429,-3.78 5.26,-1.949 R16.2@5.26,-1.01
NetD2_5: D2.5 R17.2 | length 3
  Component Side w0.15: D2.5 3.43,-2.73 4.489,-1.671 R17.2@4.489,-1.01
NetD2_6: D2.6 R18.2 | length 1.7
  Component Side w0.15: D2.6 3.43,-1.68 3.725,-1.385 R18.2@3.725,-1.01
NetD3_1: D3.1 Q4.1 R21.2 | length 4.8
  Component Side w0.15: D3.1@-10.35,1.2 -10.1,1.45 v1(-9.1,1.45) -9.1,1.68 R21.2
  Solder Side w0.15: Q4.1 -9.41,0.3 -9.1,0.61 v1(-9.1,1.45)
NetJ2_1: J2.1 R14.2 | length 7.5
  Solder Side w0.15: J2.1 -8.27,4.92 -6.245,2.895 -6.245,2.34 -5.86,1.955 -5.127,1.955 -4.985,1.813 -4.985,0.785 -5.23,0.54 R14.2
NetJ2_2: J2.2 R19.2 | length 5.4
  Solder Side w0.15: J2.2 -8.27,3.72 -6.25,1.7 -6.25,0.77 -6.03,0.55 R19.2
NetJ2_3: J2.3 R20.2 | length 4
  Solder Side w0.15: J2.3 -8.27,2.52 -6.83,1.08 R20.2 R20.2@-6.95,0.52
NetP1_2: P1.2 R1.2 | length 4.2
  Component Side w0.15: P1.2 8.2,4.11 v1(8.94,3.37)
  Solder Side w0.15: R1.2 7.28,3.86 7.435,4.015 8.785,4.015 8.94,3.86 v1(8.94,3.37)
NetP1_3: P1.3 R2.2 | length 10.3
  Component Side w0.15: R2.2 7.004,0.09 7.925,1.011 7.925,3.101 7.306,3.72 v1(6.5,3.72) ; v1(6.475,6.975) 6.93,6.52 P1.3@6.93,5.925 ; P1.3@6.88,5.965 P1.3 P1.3@6.93,5.925 ; P1.3@6.94,5.915 P1.3@6.93,5.925
  Solder Side w0.15: v1(6.475,6.975) 6.5,6.95 v1(6.5,3.72)
NetP1_4: P1.4 R3.2 | length 4.5
  Component Side w0.15: P1.4 6.93,4.13 7.04,4.02 7.43,4.02 v1(8.94,2.51)
  Solder Side w0.15: R3.2 8.09,3.36 v1(8.94,2.51)
NetP2_1: P2.1 U3.10 | length 3.5
  Component Side w0.3: U3.10 1,-9.889 3.617,-9.889 P2.1
NetP2_2: P2.2 U3.9 | length 3
  Component Side w0.3: U3.9@0.5,-9.65 0.5,-10.149 0.726,-10.375 2.547,-10.375 P2.2
NetP3_1: P3.1 U3.6 | length 3.5
  Component Side w0.3: P3.1 -3.617,-9.889 -1,-9.889 U3.6
NetP3_2: P3.2 U3.7 | length 3
  Component Side w0.3: P3.2 -2.547,-10.375 -0.726,-10.375 -0.5,-10.149 U3.7@-0.5,-9.65
NetQ1_1: Q1.1 Q2.3 R10.1 | length 3.9
  Solder Side w0.15: Q1.1@8.85,-0.68 9.6,-0.68 9.8,-0.48 R10.1
NetQ3_1: Q3.1 Q4.3 R13.1 | length 5.4
  Solder Side w0.15: R13.1 -10.5,1.018 -10.775,0.743 -10.775,-0.143 -10.25,-0.668 Q3.1 -9.31,-1.69 Q4.3
NetR4_2: R4.2 U1.44 | length 1.3
  Solder Side w0.15: U1.44 7.755,-1.62 R4.2@7.845,-1.71
NetR14_1: R14.1 U5.4 | length 1
  Solder Side w0.15: U5.4 -5.555,-1.47 -5.555,-0.925 R14.1
NetR19_1: R19.1 U5.3 | length 0.9
  Solder Side w0.15: U5.3 R19.1
NetR20_1: R20.1 U5.2 | length 1
  Solder Side w0.15: R20.1 -6.505,-0.925 -6.505,-1.47 U5.2
NetR22_1: R22.1 U6.5 | length 2
  Component Side w0.15: U6.5@-6.51,-4.37 U6.5 -6.13,-4.38 -5.18,-5.33 R22.1
NetR27_2: R27.2 U7.16 | length 2.2
  Component Side w0.15: R27.2@-2.875,4.4 -2.875,4.083 -2.265,3.473 -2.265,2.975 -2.065,2.775 U7.16
NRST: C6.2 R2.1 R5.1 U1.7 | length 8
  Component Side w0.15: v1(2.59,-5.16) R5.1@3.52,-5.16 ; R5.1 R5.1@3.52,-5.16 ; C6.2 3.68,-5.18 3.67,-5.19 3.64,-5.16 R5.1@3.52,-5.16 ; R2.1@6.42,-1.01 6.42,-1.638 3.52,-4.538 R5.1@3.52,-5.16
  Solder Side w0.15: v1(2.59,-5.16) 2.85,-4.9 U1.7
PHOTODIODE_1: Q1.3 R8.1 U1.46 | length 4.3
  Solder Side w0.15: U1.46 6.99,-2.62 7.125,-2.755 7.125,-3.095 7.31,-3.28 R8.1 8.8,-2.86 9.14,-2.52 Q1.3
PHOTODIODE_2: Q3.3 R12.1 U1.19 | length 18.1
  Solder Side w0.15: Q3.3@-9.4,-3.62 -8.93,-4.09 R12.1 -8.93,-5.208 -8.248,-5.89 -6.567,-5.89 -6.362,-6.095 -5.678,-6.095 -5.478,-5.895 -4.126,-5.895 -3.981,-5.75 -2.97,-5.75 -2.42,-5.2 -2.42,-1.272 -2.967,-0.725 -2.974,-0.725 -3.204,-0.495 -3.282,-0.417 -3.282,0.017 -2.974,0.325 -1.735,0.325 -0.795,-0.615 -0.355,-0.615 U1.19
RADIO_CE: U1.18 U7.1 | length 5.1
  Component Side w0.15: v1(-2.757,-0.2) -2.66,-0.2 -2.705,-0.155 -0.87,-0.155 U7.1 U7.1@-0.825,-0.44
  Solder Side w0.15: v1(-2.757,-0.2) -1.728,-0.2 -0.808,-1.12 U1.18 U1.18@-0.32,-1.12
RADIO_CLK: U1.29 U7.10 | length 2.2
  Component Side w0.15: v1(1.82,3.49) 2.15,3.16 U7.10
  Solder Side w0.15: v1(1.82,3.49) 2.18,3.49 2.35,3.32 U1.29
RADIO_IRQ: U1.38 U7.6 | length 15.7
  Component Side w0.15: U7.6 2.15,-0.47 1.815,-0.805 1.815,-4.273 1.947,-4.405 3.228,-4.405 5.86,-1.773 5.86,0.52 6.07,0.73 7.22,0.73 7.4,0.91 v1(7.4,1.38)
  Solder Side w0.15: U1.38 v1(7.4,1.38)
RADIO_SPI.CSN: U1.14 U7.2 | length 7.5
  Component Side w0.15: v1(-1.87,-3.43) -2.673,-2.627 -2.673,-1.006 -2.182,-0.515 -1.498,-0.515 -1.263,-0.75 -0.54,-0.75 -0.325,-0.535 U7.2
  Solder Side w0.15: v1(-1.87,-3.43) -1.33,-3.43 -1.02,-3.12 U1.14
RADIO_SPI.MISO: U1.16 U7.5 | length 11.7
  Component Side w0.15: v1@-1.365,-1.98 -1.365,-1.974 v1@-1.36,-1.969 ; U7.5 1.175,-4.187 0.657,-4.705 -0.068,-4.705 -0.628,-5.265 -1.312,-5.265 -1.795,-4.782 -1.795,-4.097 -1.345,-3.647 -1.345,-1.995 v1(-1.36,-1.98) v1@-1.36,-1.969 ; v1@-1.36,-1.969 -1.36,-1.949 -1.35,-1.959 v1@-1.36,-1.969
  Solder Side w0.15: v1(-1.36,-1.98) -0.92,-1.98 -0.78,-2.12 U1.16
RADIO_SPI.MOSI: U1.17 U7.4 | length 12.7
  Component Side w0.15: v1(-1.84,-1.34) -1.83,-1.35 -1.07,-1.35 -0.835,-1.585 -0.835,-2.173 -0.835,-3.563 -1.495,-4.223 -1.495,-4.657 -1.187,-4.965 -0.753,-4.965 -0.193,-4.405 0.533,-4.405 0.665,-4.273 0.665,-0.565 0.675,-0.555 U7.4
  Solder Side w0.15: v1(-1.84,-1.34) -1.09,-1.34 -0.81,-1.62 U1.17 U1.17@-0.36,-1.61
RADIO_SPI.SCK: U1.15 U7.3 | length 6.6
  Component Side w0.15: v1(-1.87,-2.61) -2.365,-2.115 -2.365,-1.123 -2.057,-0.815 -1.623,-0.815 -1.388,-1.05 -0.19,-1.05 0.175,-0.685 U7.3
  Solder Side w0.15: v1(-1.87,-2.61) -0.36,-2.61 U1.15 U1.15@-0.32,-2.62
RGBLED1: R17.1 U1.31 | length 9
  Component Side w0.15: v1(3.63,5.43) 3.615,5.415 3.615,3.957 4.489,3.084 R17.1@4.489,-0.01
  Solder Side w0.15: U1.31 3.35,2.818 3.835,3.303 3.835,3.737 3.615,3.957 3.615,5.415 v1(3.63,5.43)
RGBLED2: R16.1 U1.32 | length 6.4
  Component Side w0.15: R16.1@5.26,-0.01 5.26,1.07 4.95,1.38 4.95,3.21 v1(5.47,3.73)
  Solder Side w0.15: U1.32 3.85,2.893 4.197,3.24 4.52,3.24 5.01,3.73 v1(5.47,3.73)
RGBLED3: R18.1 U1.30 | length 4.9
  Component Side w0.15: v1@3.19,3.53 3.725,2.995 R18.1@3.725,-0.01
  Solder Side w0.15: U1.30 2.85,3.05 3.31,3.51 v1(3.31,3.52)
SWCLK: R3.1 U1.37 | length 2
  Solder Side w0.15: U1.37 7.05,1.88 7.12,1.95 7.93,1.95 8.09,2.11 R3.1
SWDIO: R1.1 U1.34 | length 3.2
  Solder Side w0.15: U1.34 4.85,3 5.04,3.19 6.58,3.19 R1.1@7.252,2.518
T\O\U\C\H\_\C\H\G\: R15.1 U1.20 U5.14 | length 14.6
  Solder Side w0.15: U5.14 -6.48,-4.988 -6.545,-5.053 -6.545,-5.487 -6.237,-5.795 -5.803,-5.795 -5.603,-5.595 -4.25,-5.595 -4.105,-5.45 -3.094,-5.45 -2.95,-5.306 R15.1 -2.95,-4.46 -2.72,-4.23 -2.72,-1.397 -3.092,-1.025 -3.098,-1.025 -3.328,-0.795 -3.582,-0.542 -3.582,0.142 -3.098,0.625 -1.611,0.625 -0.866,-0.12 U1.20
VBAT: C12.2 C16.2 J1.1 U1.1 U4.4 U4.6 U6.3 | length 28.4
  Component Side w0.3: U4.4 -4.95,-8.475 v1(-4.3,-9.125) -3.65,-8.475 U4.6
  Solder Side w0.15: v1(-4.3,-9.125) -3.126,-9.125 -2.406,-9.845 3.278,-9.845 3.742,-9.38 5.002,-9.38 5.31,-9.073 5.31,-8.62 5.76,-8.17 7.308,-8.17 7.74,-7.738 7.74,-5.86 6.83,-4.95 6,-4.95 5.85,-4.8 U1.1 U1.1@5.88,-4.35
  Solder Side w0.3: v1(-8.92,-6.28) -8.4,-6.8 C16.2 -6.67,-6.8 ; J1.1@-5.588,-6.8 -6.67,-6.8 ; v1(-4.3,-9.125) -5.885,-9.125 -6.67,-8.34 -6.67,-6.8
VDD_PA: B1.5 C21.2 U7.11 | length 2.4
  Component Side w0.254: B1.5 1.76,5 1.76,4.618 1.24,4.098 1.175,4.098 U7.11
pads on no net: B1.6 J1.3 J1.4 J2.4 J2.5 P1. P1.6 U1.2 U1.3 U1.4 U1.27 U1.28 U1.33 U1.35 U1.36 U1.39 U1.45 U2.9 U2.10 U2.11 U5.1 U5.5 U5.6 U5.7 U5.10 U5.16 U5.17 U5.18 U5.19 U5.20 U7.9

## Polygon pours and split planes (outlines as drawn)
GND on Solder Side "Bottom Ground Plane" (solid, remove dead copper, pour order 4): -11.97,-0.848 ccw(c0,0) 11.97,-0.848 cw(c12.5,0) 11.97,0.848 ccw(c0,0) -11.97,0.848 cw(c-12.5,0)
GND on Component Side "Bottom Ground Plane" (solid, remove dead copper, pour order 3): -11.97,-0.848 ccw(c0,0) 11.97,-0.848 cw(c12.5,0) 11.97,0.848 ccw(c0,0) -11.97,0.848 cw(c-12.5,0)
GND on Ground Plane (split plane): 164 vertices, not listed, extent -11.44,-11.492 11.44,10.967
+3.3V on Power Plane (split plane): 164 vertices, not listed, extent -11.44,-11.492 11.44,10.967

## Keep-outs
Keep-Out Layer:
  pour cut-out: 4.575,7.6 4.575,12.211 -3.425,12.211 -3.425,7.6

## Other copper
Component Side:
  rectangle net GND: 0.575,8.9 1.175,11
  rectangle net GND: 1.175,10.4 4.675,11
  rectangle net GND: -3.675,10.25 -3.425,11.445
Ground Plane (plane layer: these items are gaps in the copper):
  pour cut-out: -4.73,1.325 -4.73,3.38 -7.65,6.3 -9.58,6.3 -9.58,3.02 -7.6,3.02 -7.6,1.325
  pour cut-out: 4.575,7.6 4.575,12.2 -3.425,12.2 -3.425,7.6
Power Plane (plane layer: these items are gaps in the copper):
  pour cut-out: 4.575,7.6 4.575,12.211 -3.425,12.211 -3.425,7.6
  pour cut-out: -4.73,1.325 -4.73,3.38 -7.65,6.3 -9.58,6.3 -9.58,3.02 -7.6,3.02 -7.6,1.325

## Silkscreen, mask and mechanical layers (free items; w line width, h text height)
Board Outline:
  lines w0.254: -11.999,-0.85 ccw(c-12.5,0) -11.998,0.85 cw(c0,0) 11.998,0.852 ; -11.998,-0.852 ccw(c0,0) 11.998,-0.85 cw(c12.5,0) 11.999,0.85
Mechanical 10:
  the board outline again, w0.1